# Altium PCB USB2RS485.PcbDoc
Units mm, origin at the board's own origin, x right, y up, seen from the top; angles counter-clockwise.
Board outline 30.7 x 21.56 mm, 2 copper layers (Top Layer, Bottom Layer); 9 components, 10 nets, 38 pads, 10 vias.
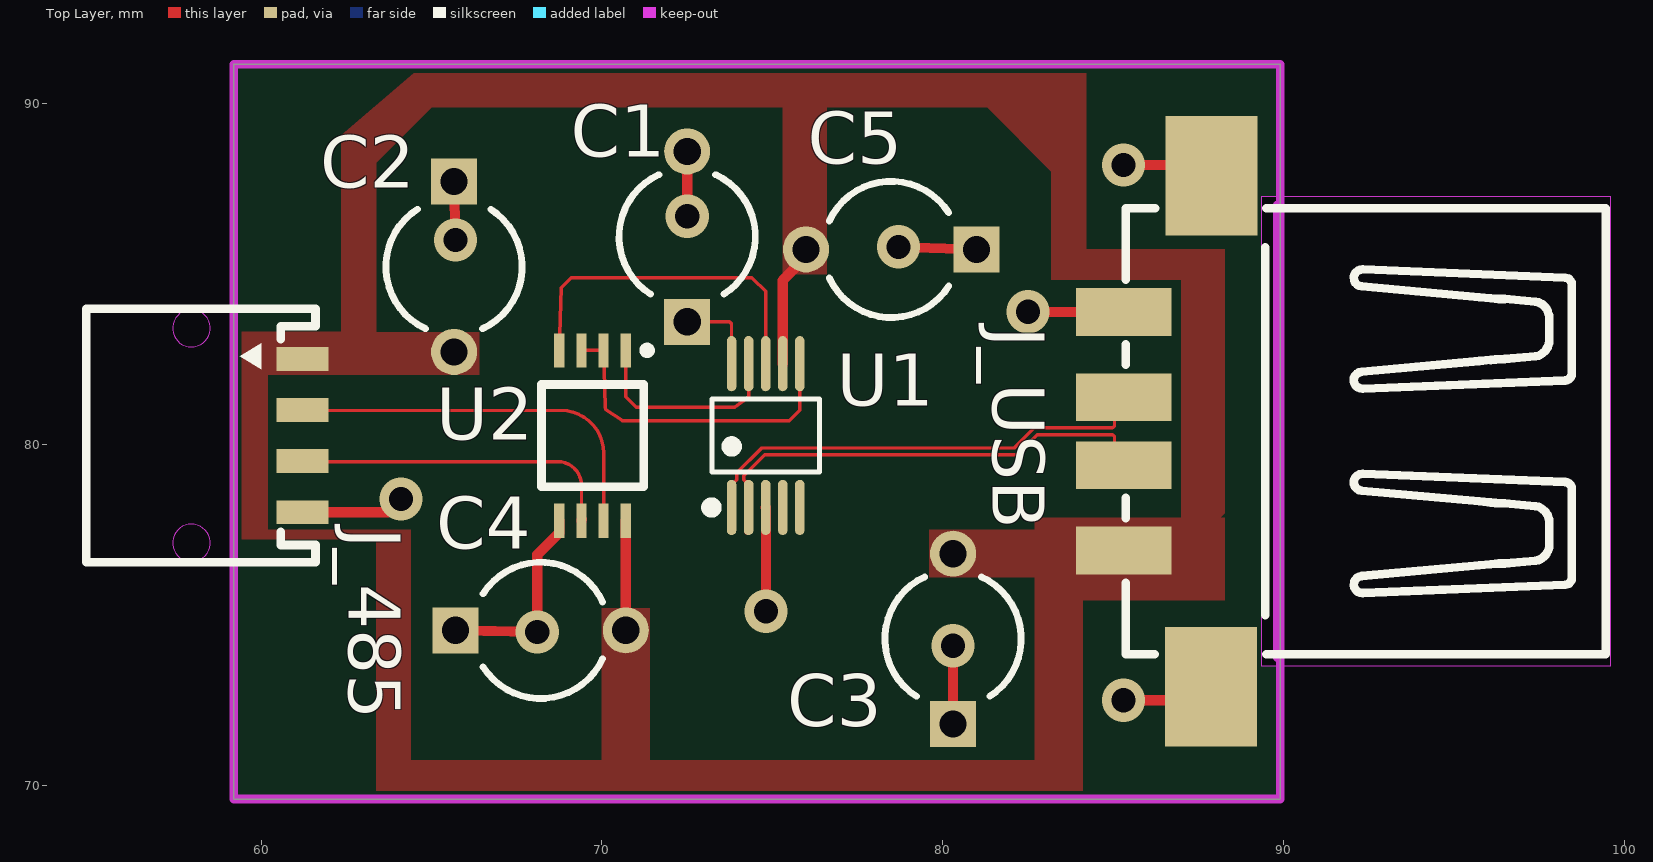
[diagram p0: Top Layer view]
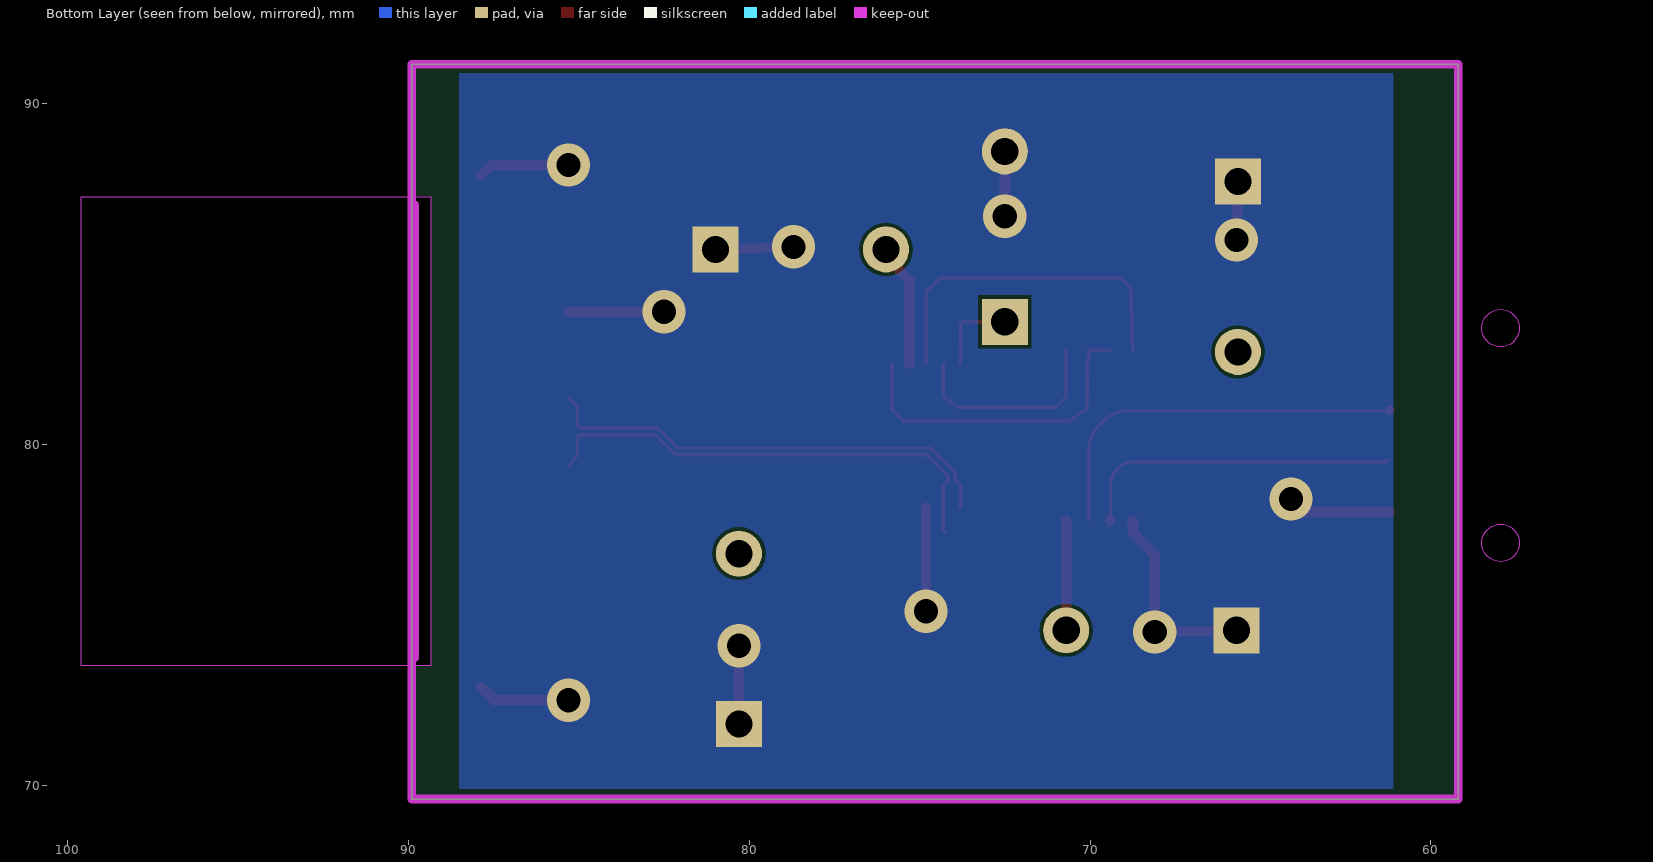
[diagram p1: Bottom Layer view, seen from below]

## Layer stack, top to bottom
Top Solder: solder mask 0.0102, Solder Resist, Dk 3.5
Top Layer: signal copper 0.0356
Dielectric 1: dielectric 0.32, FR-4, Dk 4.8
Bottom Layer: signal copper 0.0356
Bottom Solder: solder mask 0.0102, Solder Resist, Dk 3.5

## Board outline
59.2,69.6 89.9,69.6 89.9,91.162 59.2,91.162

## Design rules (kind name [scope] priority, off if disabled: settings)
Clearance [All] p1: gap=0.1 ignorepadtopadclearanceinfootprint=FALSE
DiffPairsRouting [All] p1: maxlimit=1 minlimit=0.1 mostfreqgap=0.1 toplayer_minwidth=0.1 toplayer_maxwidth=1 toplayer_prefwidth=0.1 bottomlayer_minwidth=0.1 bottomlayer_maxwidth=1 bottomlayer_prefwidth=0.1 maxuncoupledlength=12.7
MinimumSolderMaskSliver [All] p1: minsoldermaskwidth=0
PolygonConnect [All] p1: connectstyle=Direct reliefconductorwidth=0.254 reliefentries=4 polygonreliefangle="90 Angle" airgapwidth=0.254
RoutingVias [All] p1: holewidth=0.2 width=0.45 viastyle="Through Hole" minholewidth=0.2 minwidth=0.45 maxholewidth=1 maxwidth=2
SilkToSilkClearance [All] p1: silktosilkclearance=0.1
SilkToSolderMaskClearance [IsPad] p1: minsilkscreentomaskgap=0.1 clearancetoexposedcopper=TRUE
SolderMaskExpansion [All] p1: expansion=0.102 istentingtop=FALSE
Width [All] p1: maxlimit=2 minlimit=0.1 preferedwidth=0.25
26 further rules are at their usual default settings.

## Classes and differential pairs
component class USB2RS485: C1 C2 C3 C4 C5 J_485 U1 U2
differential pair USB: +USB_P -USB_N
differential pair 485: +485_P -485_N

## Components (designator, comment, footprint, x,y, rotation, side; value= is the part's Value field where it differs from the comment)
C1 "Cap2" CAPR5-4X5 72.5,86.1 r90 top value=0.1uF
C2 "Cap2" CAPR5-4X5 65.659,85.217 r270 top value="10uF 10V"
C3 "Cap2" CAPR5-4X5 80.3,74.3 r90 top value="10uF 10V"
C4 "Cap2" CAPR5-4X5 68.199,74.549 r0 top value=0.1uF
C5 "Cap2" CAPR5-4X5 78.486,85.725 r180 top value=0.1uF
J_485 "S4B-ZR-SM2" SM2 61.214,80.264 r270 top
J_USB "CONN-USBA-SMD" USB-A-SMD_AF 86.614,80.391 r90 top
U1 "CH340E" MSOP10 74.803,80.264 r0 top
U2 "SIT65HVD08" MSOP8 69.723,80.264 r180 top

## Footprints (in the part's own frame and the unit in brackets; to place one, negate y for a bottom-side part, rotate by r counter-clockwise, add the part's x,y. Pads: shape width x height; smd on the part's side, far side on the other; paste and mask are expansions set on the pad)
CAPR5-4X5 [mm] "Capacitor; 2 Leads"
  rect 1.35x1.35 hole 0.8: 1(-2.5,0)
  round 1.35 hole 0.8: 2(2.5,0)
  silkscreen extent -1.69,-2 1.82,2
MSOP8 [mm]
  rect 0.3x1 smd: 1(-0.975,-2.5) 2(-0.325,-2.5) 3(0.325,-2.5) 4(0.975,-2.5) 5(0.975,2.5) 6(0.325,2.5) 7(-0.325,2.5) 8(-0.975,2.5)
  silkscreen extent -1.7,-2.6 1.5,1.5, body extent -1.5,-2.1 3,2.1, height 0.25
MSOP10 [mm]
  oval 0.28x1.62 smd paste+0 mask+0.051: 1(-1,-2.11) 2(-0.5,-2.11) 3(0,-2.11) 4(0.5,-2.11) 5(1,-2.11) 6(1,2.11) 7(0.5,2.11) 8(0,2.11) 9(-0.5,2.11) 10(-1,2.11)
  silkscreen extent -1.74,-2.26 1.58,1.07, body extent -1.5,-1.5 1.5,1.5, height 1.1
SM2 [mm]
  rect 0.7x1.524 smd paste+0 mask+0.05: 1(-2.25,0) 2(-0.75,0) 3(0.75,0) 4(2.25,0)
  Keep-Out Layer board cut-out: -2.6,-3.262 -2.654,-3.023 -2.807,-2.832 -3.027,-2.726 -3.272,-2.726 -3.493,-2.832 -3.645,-3.023 -3.7,-3.262 -3.7,-3.262 -3.645,-3.501 -3.493,-3.692 -3.272,-3.798 -3.027,-3.798 -2.807,-3.692 -2.654,-3.501 -2.6,-3.262
  Keep-Out Layer board cut-out: 3.7,-3.262 3.645,-3.023 3.493,-2.832 3.272,-2.726 3.027,-2.726 2.807,-2.832 2.654,-3.023 2.6,-3.262 2.6,-3.262 2.654,-3.501 2.807,-3.692 3.027,-3.798 3.272,-3.798 3.493,-3.692 3.645,-3.501 3.7,-3.262
  silkscreen extent -3.72,-6.35 3.72,0.38, body extent -3.83,-6.47 3.84,2.07, height 1.6
USB-A-SMD_AF [mm]
  rect 1.4x2.8 smd paste+0 mask+0.051: 1(-3.5,1.3) 2(-1,1.3) 3(1,1.3) 4(3.5,1.3)
  rect 3.5x2.7 smd paste+0 mask+0.051: SH1(7.5,-1.27) SH2(-7.5,-1.26)
  Keep-Out Layer board cut-out: -6.877,-2.726 -6.877,-12.98 6.877,-12.98 6.877,-2.726 -6.877,-2.726
  Keep-Out Layer lines w0.254: -6.65,-3.2 6.65,-3.2 -6.65,-3.2
  silkscreen extent -6.54,-12.84 6.54,1.25

## Part data
C1 C2 C3 C4 C5: "Capacitor", PackageDescription="Capacitor; 2 Leads", PackageReference=CAPR5-4X5, Published=23-Sep-2002, Publisher="Altium Limited"
J_485: library part CONN4B
J_USB: library part CONN-USB
U2: library part SIT65HVD08DGK

## Via types
v1: diameter 1.27, hole 0.711, Top Layer to Bottom Layer, 10 vias

## Nets (pads, with @x,y where several pads share a name; then routed paths per layer and width w, separated by ;. In a path a pad name is that pad's centre, name@x,y a point inside that pad or via, vN(x,y) a via of type N, cw(c..) or ccw(c..) an arc to the next point about the centre after c; other vN are vias at no path point)
485_N: J_485.2 U2.7 | length 11.5
  Top Layer w0.1: J_485.2@61.214,81 68.8,81 cw(c68.8,79.752) 70.048,79.752 U2.7
  Top Layer w0.3: J_485.2@61.214,81 J_485.2
485_P: J_485.3 U2.6 | length 9.6
  Top Layer w0.1: J_485.3@61.291,79.546 ccw(c61.336,79.546) 61.336,79.5 68.7,79.5 cw(c68.7,78.802) 69.398,78.802 U2.6
  Top Layer w0.3: U2.6 U2.6@69.41,77.793
GND: C1.2 C2.1 C3.1 C4.1 C5.1 J_485.4 J_USB.4 J_USB.SH1 J_USB.SH2 U1.3 U2.5 | length 28.5
  Top Layer w0.3: J_485.4 63.714,78.014 v1(64.1,78.4) ; C2.1 v1(65.7,86) ; C4.1 v1(68.1,74.5) 68.1,76.766 68.748,77.414 U2.5 ; v1(72.5,86.7) C1.2 ; v1(74.813,75.113) U1.3@74.813,78.144 ; v1(78.7,85.8) C5.1 ; C3.1 v1(80.3,74.1) ; v1(82.5,83.9) J_USB.4 ; v1(85.3,72.5) 87.483,72.5 J_USB.SH2 ; v1(85.3,88.2) 87.575,88.2 J_USB.SH1 ; U1.3@74.813,78.144 U1.3 U1.3@74.813,78.144
NetC1_1: C1.1 U1.10 | length 2.5
  Top Layer w0.1: C1.1 73.742,83.6 73.8,83.542 73.8,83.501 U1.10
RW_485: U1.6 U2.2 U2.3 | length 9.7
  Top Layer w0.1: U2.3 U2.2 70.101,81.083 70.102,81.032 70.6,80.7 75.5,80.7 75.529,80.729 75.803,81.003 U1.6
RXD: U1.9 U2.1 | length 6.2
  Top Layer w0.1: U2.1 70.7,81.441 70.7,81.4 70.971,81.129 71,81.1 73.9,81.1 74.26,81.37 74.266,81.374 74.3,81.409 U1.9
TXD: U1.8 U2.4 | length 10.3
  Top Layer w0.1: U2.4 68.8,84.6 69.1,84.9 74.4,84.9 74.429,84.871 74.8,84.5 74.8,84.459 U1.8
USB_N: J_USB.2 U1.2 | length 14.1
  Top Layer w0.1: U1.2@74.236,77.418 74.303,77.486 U1.2 74.303,78.823 74.153,78.973 74.153,79.084 74.769,79.7 82.173,79.7 82.764,80.291 84.979,80.291 85.038,80.232 85.038,79.668 J_USB.2
USB_P: J_USB.3 U1.1 | length 13.7
  Top Layer w0.1: U1.1 73.803,78.823 73.953,78.973 73.953,79.167 74.686,79.9 82.091,79.9 82.681,80.491 84.979,80.491 85.038,80.549 85.038,81.114 J_USB.3
VCC_5V: C2.2 C3.2 C4.2 C5.2 J_485.1 J_USB.1 U1.7 U2.8 | length 6.8
  Top Layer w0.3: U2.8 C4.2 C4.2 ; U1.7 75.303,84.817 75.986,85.5 C5.2
pads on no net: U1.4 U1.5

## Polygon pours and split planes (outlines as drawn)
VCC_5V on Top Layer "VCC_5V_L01_P008" (solid, remove dead copper, pour order 8): 70,70.7 70,75.2 71.4,75.2 71.4,70.7
VCC_5V on Top Layer "VCC_5V_L01_P007" (solid, remove dead copper, pour order 7): 83.7,77.5 79.6,77.5 79.6,76.1 83.7,76.1
VCC_5V on Top Layer "VCC_5V_L01_P006" (solid, remove dead copper, pour order 6): 63.373,82.042 66.4,82.042 66.4,83.3 66.3,83.3 63.3,83.3 63.3,82.115
VCC_5V on Top Layer "VCC_5V_L01_P005" (solid, remove dead copper, pour order 5): 75.3,90.2 75.3,85 76.6,85 76.6,90.2
VCC_5V on Top Layer "VCC_5V_L01_P001" (solid, remove dead copper, pour order 1): 88.265,77.851 88.265,75.438 84.1,75.438 84.1,69.85 63.373,69.85 63.373,77.216 59.436,77.216 59.436,83.312 62.357,83.312 62.357,89.081 64.479,90.9 84.201,90.9 84.201,85.725 88.265,85.725 88.265,77.851 86.995,77.851 86.995,84.836 83.185,84.836 83.185,88.011 81.296,89.9 65.008,89.9 63.373,88.265 63.373,82.042 60.198,82.042 60.198,77.5 64.389,77.5 64.389,70.739 79.248,70.739 82.7,70.739 82.7,77.851
GND on Bottom Layer "VCC_5V_L02_P-001" (solid, remove dead copper, pour order 9): 88.5,69.9 88.5,90.9 61.1,90.9 61.1,69.9

## Keep-outs
Keep-Out Layer:
  lines w0.254: 59.2,69.6 89.3,69.6 89.9,69.6 89.9,91.162 59.2,91.162 59.2,69.6